# EAGLE board CT_schematic (EAGLE 7.6.0)

Size 100 x 80 mm. Coordinates in mm from the lower left corner, seen from the top.
Outline: 0,0 100,0 100,80 0,80 0,0
Copper layers (1*16): Top 0.035mm / dielectric 1.5mm / Bottom 0.035mm
Design rules "default": minimum track width 10mil, minimum drill 24mil, track to track 8mil, track to pad 8mil, pad to pad 8mil, via to via 8mil, smd to smd 8mil, copper to edge 40mil, drill to drill 8mil, minimum pad ring 10mil, minimum via ring 8mil, stop-mask expansion 4mil, vias tented up to drill 0mil, thermal gap 10mil

## Footprints (pad centres in the part's own frame; a part is rotated, then mirrored left to right if it is on the bottom)
C0603 = smd 0.8 x 0.8: 1 -0.762,0; 2 0.762,0
C0402 = smd 0.5 x 0.5: 1 -0.508,0; 2 0.508,0
C1210 = smd 1.2 x 2.5: 1 -1.524,0; 2 1.524,0
EXV-9H = smd 3.505 x 1.676: 1 -2.857,0; 2 2.857,0
L0603 = smd 0.8 x 0.8: 1 -0.762,0; 2 0.762,0
PJ-037B_PACKAGE = drill 3.7 square: 1 12,0 | drill 3.2 square: 2 6,0
R0603 = smd 0.8 x 0.8: 1 -0.762,0; 2 0.762,0
LQFP48 = smd 0.3 x 1.2: 1 -2.75,-4.25; 2 -2.25,-4.25; 3 -1.75,-4.25; 4 -1.25,-4.25; 5 -0.75,-4.25; 6 -0.25,-4.25; 7 0.25,-4.25; 8 0.75,-4.25; 9 1.25,-4.25; 10 1.75,-4.25; 11 2.25,-4.25; 12 2.75,-4.25; 25 2.75,4.25; 26 2.25,4.25; 27 1.75,4.25; 28 1.25,4.25; 29 0.75,4.25; 30 0.25,4.25; 31 -0.25,4.25; 32 -0.75,4.25; 33 -1.25,4.25; 34 -1.75,4.25; 35 -2.25,4.25; 36 -2.75,4.25 | smd 1.2 x 0.3: 13 4.25,-2.75; 14 4.25,-2.25; 15 4.25,-1.75; 16 4.25,-1.25; 17 4.25,-0.75; 18 4.25,-0.25; 19 4.25,0.25; 20 4.25,0.75; 21 4.25,1.25; 22 4.25,1.75; 23 4.25,2.25; 24 4.25,2.75; 37 -4.25,2.75; 38 -4.25,2.25; 39 -4.25,1.75; 40 -4.25,1.25; 41 -4.25,0.75; 42 -4.25,0.25; 43 -4.25,-0.25; 44 -4.25,-0.75; 45 -4.25,-1.25; 46 -4.25,-1.75; 47 -4.25,-2.25; 48 -4.25,-2.75
88-00153-02 = smd 1.6 x 1.6: 1 -0.2,0; 13 15,0; 20 15,9.2; 32 -0.2,9.2 | smd 0.8 x 1.6: 2 1.4,0; 3 2.6,0; 4 3.8,0; 5 5,0; 6 6.2,0; 7 7.4,0; 8 8.6,0; 9 9.8,0; 10 11,0; 11 12.2,0; 12 13.4,0; 21 13.4,9.2; 22 12.2,9.2; 23 11,9.2; 24 9.8,9.2; 25 8.6,9.2; 26 7.4,9.2; 27 6.2,9.2; 28 5,9.2; 29 3.8,9.2; 30 2.6,9.2; 31 1.4,9.2; 49 17.8,0 | smd 1.6 x 0.8: 14 15,1.6; 15 15,2.8; 16 15,4; 17 15,5.2; 18 15,6.4; 19 15,7.6; 33 -0.2,7.6; 34 -0.2,6.4; 35 -0.2,5.2; 36 -0.2,4; 37 -0.2,2.8; 38 -0.2,1.6 | smd 2 x 2: 39 3.5,3; 40 7.4,3; 41 11.3,3; 42 11.3,6.2; 43 7.4,6.2; 44 3.5,6.2 | smd 0.5 x 0.5: 45 1.55,3.85; 46 1.55,2.75; 47 1.55,1.65 | smd 0.8 x 0.8: 48 16.6,-0.4
ABS07-32.768KHZ-7-T = smd 1.1 x 2.4: 1 -2.5,0; 2 0,0
ABLS-25.000MHZ-B2F-T = smd 5.6 x 2.8: 1 -3.81,0; 2 5.69,0
WSON-8 = smd 0.3 x 0.6: 1 -0.75,0; 2 0.05,0; 3 0.85,0; 4 1.65,0; 5 1.65,3.8; 6 0.85,3.8; 7 0.05,3.8; 8 -0.75,3.8 | smd 3 x 2.6: PAD 0.45,1.9
SON-6 = smd 0.55 x 0.3: 1 -0.355,0.5 | smd 0.52 x 0.3: 2 -0.37,0; 3 -0.37,-0.5; 4 0.37,-0.5; 5 0.37,0; 6 0.37,0.5
SW_4-1437565-2 = smd 1.4 x 2.1: 1 -2.23,4.55; 2 -2.23,-4.55; 3 2.23,4.55; 4 2.23,-4.55
LGM67K-G1J2-24-Z = smd 0.8 x 1.4: A -2,0; C 0,0
NC7SZ125M5X = smd 1.3 x 0.7: 1 -1.3,0.95; 2 -1.3,0; 3 -1.3,-0.95; 4 1.3,-0.95; 5 1.3,0.95

## Placement (x,y rotation side)
C1  1e-06  [C0603]  -33.02,59.69 0 top  (outside the outline)
C2  1e-07  [C0603]  -36.83,59.69 0 top  (outside the outline)
C3  1e-07  [C0603]  -40.64,59.69 0 top  (outside the outline)
C4  1e-07  [C0603]  -44.45,59.69 0 top  (outside the outline)
C5  4.7e-06  [C0603]  -29.21,59.69 0 top  (outside the outline)
C6  1e-07  [C0603]  -48.26,59.69 0 top  (outside the outline)
C7  1e-08  [C0603]  -52.07,59.69 0 top  (outside the outline)
C8  1e-06  [C0603]  -55.88,59.69 0 top  (outside the outline)
C9  1e-11  [C0402]  -41.91,64.77 0 top  (outside the outline)
C10  1e-11  [C0402]  -45.72,64.77 0 top  (outside the outline)
C11  1e-11  [C0402]  -49.53,64.77 0 top  (outside the outline)
C12  1e-11  [C0402]  -53.34,64.77 0 top  (outside the outline)
C13  1e-07  [C0402]  -57.15,64.77 0 top  (outside the outline)
C14  1e-06  [C0603]  -59.69,59.69 0 top  (outside the outline)
C15  1e-07  [C0402]  -60.96,64.77 0 top  (outside the outline)
C16  1e-06  [C0603]  -63.5,59.69 0 top  (outside the outline)
C17  1e-08  [C0402]  -15.24,69.85 0 top  (outside the outline)
C18  1e-05  [C1210]  -29.21,46.99 0 top  (outside the outline)
C19  1e-05  [C1210]  -35.56,46.99 0 top  (outside the outline)
C20  1e-07  [C0402]  -19.05,69.85 0 top  (outside the outline)
C21  0.0001  [EXV-9H]  -38.1,31.75 0 top  (outside the outline)
C22  0.0001  [EXV-9H]  -49.53,31.75 0 top  (outside the outline)
C23  1e-08  [C0402]  -22.86,69.85 0 top  (outside the outline)
C24  1e-08  [C0402]  -26.67,69.85 0 top  (outside the outline)
F1  240.0  [L0603]  -15.24,64.77 0 top  (outside the outline)
J1  PJ-037B  [PJ-037B_PACKAGE]  -57.15,7.62 0 top  (outside the outline)
R1  10000.0  [R0603]  -15.24,54.61 0 top  (outside the outline)
R2  1000.0  [R0603]  -19.05,64.77 0 top  (outside the outline)
R3  1500.0  [R0603]  -22.86,64.77 0 top  (outside the outline)
R4  4700.0  [R0603]  -26.67,64.77 0 top  (outside the outline)
R5  4700.0  [R0603]  -30.48,64.77 0 top  (outside the outline)
R6  10000.0  [R0603]  -20.32,54.61 0 top  (outside the outline)
R7  10000.0  [R0603]  -25.4,54.61 0 top  (outside the outline)
R8  34000.0  [R0603]  -30.48,54.61 0 top  (outside the outline)
R9  34000.0  [R0603]  -35.56,54.61 0 top  (outside the outline)
R10  34000.0  [R0603]  -40.64,54.61 0 top  (outside the outline)
R11  34000.0  [R0603]  -45.72,54.61 0 top  (outside the outline)
R12  34000.0  [R0603]  -50.8,54.61 0 top  (outside the outline)
R13  34000.0  [R0603]  -55.88,54.61 0 top  (outside the outline)
R14  10000.0  [R0603]  -60.96,54.61 0 top  (outside the outline)
R15  100000.0  [R0603]  -53.34,46.99 0 top  (outside the outline)
R16  2000.0  [R0603]  -34.29,64.77 0 top  (outside the outline)
R17  1000.0  [R0603]  -38.1,64.77 0 top  (outside the outline)
R18  10000.0  [R0603]  -15.24,59.69 0 top  (outside the outline)
R19  10000.0  [R0603]  -20.32,59.69 0 top  (outside the outline)
R20  11000.0  [R0603]  -25.4,59.69 0 top  (outside the outline)
R21  620000.0  [R0603]  -58.42,46.99 0 top  (outside the outline)
R22  120000.0  [R0603]  -63.5,46.99 0 top  (outside the outline)
U1  stm32f031c4t7  [LQFP48]  -41.91,20.32 0 top  (outside the outline)
U2  88-00153-02  [88-00153-02]  -40.64,2.54 0 top  (outside the outline)
U3  ABS07-32.768KHZ-7-T  [ABS07-32.768KHZ-7-T]  -49.53,40.64 0 top  (outside the outline)
U4  ABLS-25.000MHZ-B2F-T  [ABLS-25.000MHZ-B2F-T]  -26.67,40.64 0 top  (outside the outline)
U5  LP3878SDX-ADJ/NOPB  [WSON-8]  -30.48,30.48 0 top  (outside the outline)
U6  TPS3895ADRYR  [SON-6]  -29.21,68.58 0 top  (outside the outline)
U7  4-1437565-2  [SW_4-1437565-2]  -27.94,21.59 0 top  (outside the outline)
U8  Q65110A2395  [LGM67K-G1J2-24-Z]  -17.78,48.26 0 top  (outside the outline)
U9  nc7sz125m5x  [NC7SZ125M5X]  -40.64,46.99 0 top  (outside the outline)
U10  nc7sz125m5x  [NC7SZ125M5X]  -46.99,46.99 0 top  (outside the outline)

## Library data of the parts
C1-C24 F1 J1 R1-R22 U1-U10 = circuit_tree

## Nets
CLK_CRYSTAL_U1_3: C9.1 U1.3 U3.1
CLK_CRYSTAL_U1_4: C10.1 U1.4 U3.2
CLK_CRYSTAL_U1_5: C11.1 U1.5 U4.1
CLK_CRYSTAL_U1_6: C12.1 U1.6 U4.2
GND: C1.2 C2.2 C3.2 C4.2 C5.2 C6.2 C7.2 C8.2 C9.2 C10.2 C11.2 C12.2 C13.2 C14.2 C15.2 C16.2 C17.2 C18.2 C19.2 C20.2 C21.2 C22.2 C23.2 C24.2 J1.2 R2.2 R6.2 R17.2 R20.2 R22.2 U1.8 U1.23 U1.47 U2.1 U2.9 U2.13 U2.14 U2.15 U2.16 U2.17 U2.18 U2.19 U2.20 U2.21 U2.22 U2.23 U2.24 U2.25 U2.26 U2.27 U2.31 U2.32 U2.39 U2.40 U2.41 U2.42 U2.43 U2.44 U2.49 U5.3 U5.PAD U6.2 U8.C U9.1 U9.3 U10.1 U10.3
NET_U1_7: R5.1 U1.7 U10.4
NET_U1_9: C7.1 C8.1 F1.1 U1.9
NET_U1_44: R6.1 U1.44
NET_U1_45: R3.1 U1.45 U8.A
NET_U1_46: R1.1 U1.46 U7.3 U7.4
NET_U2_2: R10.1 U2.2
NET_U2_6: R14.1 U2.6
NET_U2_10: R4.1 U2.10 U9.4
NET_U2_11: R7.1 U2.11
NET_U2_34: R9.1 U2.34
NET_U5_1: C17.1 U5.1
NET_U5_6: R16.2 R17.1 U5.6
NET_U5_8: R15.1 U5.8
NET_U6_1: R19.1 R20.1 U6.1
NET_U6_3: R21.2 R22.1 U6.3
NET_U6_4: R18.1 U6.4 U9.2 U10.2
NET_U7_1: R2.1 U7.1 U7.2
PROC_SPI1_MISO: R8.1 U1.16 U2.35
PROC_SPI1_MOSI: R12.1 U1.17 U2.37
PROC_SPI1_NSS: R11.1 U1.14 U2.38
PROC_SPI1_SCK: R13.1 U1.15 U2.36
VCC_S1_11V3: C18.1 C21.1 C22.1 J1.1 R15.2 U5.4
VCC_TIER1_3V0: C1.1 C2.1 C3.1 C4.1 C5.1 C6.1 C13.1 C14.1 C15.1 C16.1 C19.1 C20.1 C23.1 C24.1 F1.2 R1.2 R3.2 R4.2 R5.2 R7.2 R8.2 R9.2 R10.2 R11.2 R12.2 R13.2 R14.2 R16.1 R18.2 R19.2 R21.1 U1.1 U1.24 U1.48 U2.12 U2.33 U5.5 U6.6 U9.5 U10.5

## Tracks (layer width: path | path; a pad name or v marks a point on that pad's centre or on a via)
CLK_CRYSTAL_U1_3  (2 unrouted)
CLK_CRYSTAL_U1_4  (2 unrouted)
CLK_CRYSTAL_U1_5  (2 unrouted)
CLK_CRYSTAL_U1_6  (2 unrouted)
GND  (66 unrouted)
NET_U1_7  (2 unrouted)
NET_U1_9  (3 unrouted)
NET_U1_44  (1 unrouted)
NET_U1_45  (2 unrouted)
NET_U1_46  (3 unrouted)
NET_U2_2  (1 unrouted)
NET_U2_6  (1 unrouted)
NET_U2_10  (2 unrouted)
NET_U2_11  (1 unrouted)
NET_U2_34  (1 unrouted)
NET_U5_1  (1 unrouted)
NET_U5_6  (2 unrouted)
NET_U5_8  (1 unrouted)
NET_U6_1  (2 unrouted)
NET_U6_3  (2 unrouted)
NET_U6_4  (3 unrouted)
NET_U7_1  (2 unrouted)
PROC_SPI1_MISO  (2 unrouted)
PROC_SPI1_MOSI  (2 unrouted)
PROC_SPI1_NSS  (2 unrouted)
PROC_SPI1_SCK  (2 unrouted)
VCC_S1_11V3  (5 unrouted)
VCC_TIER1_3V0  (39 unrouted)